# EAGLE board SparkFun_MicroMod_Function_ADIN1110-Panel_v01d (EAGLE 9.6.2), part 1 of 2
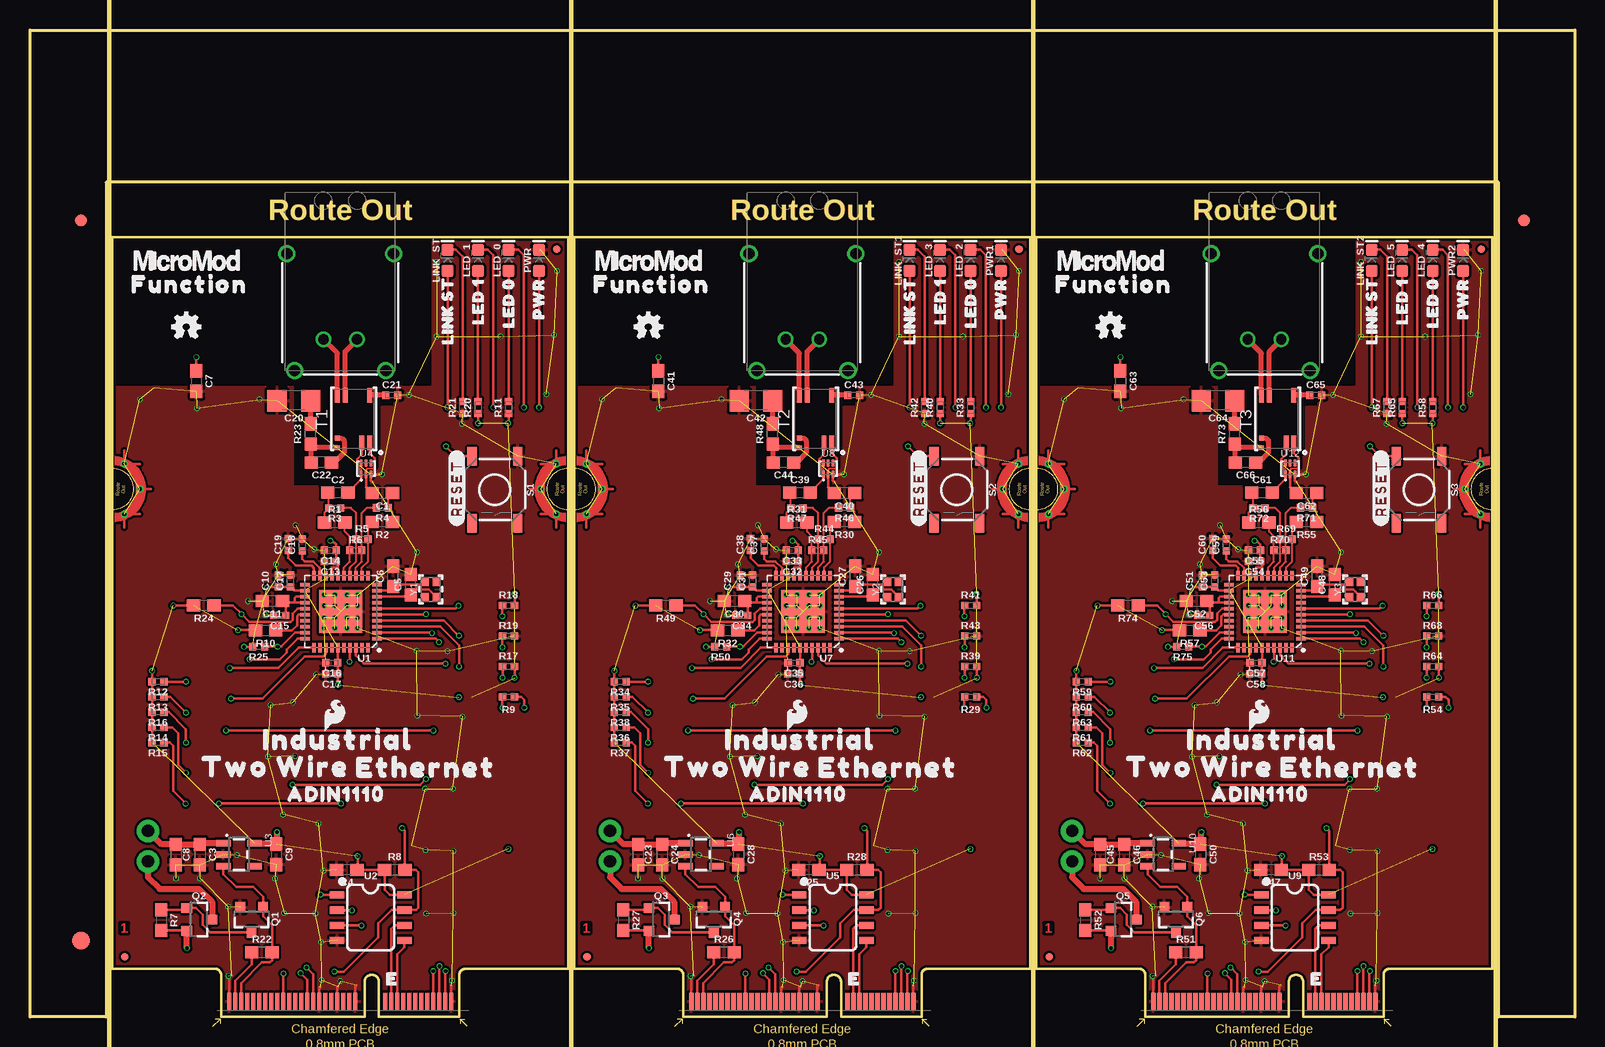
[diagram p0: board, top side]
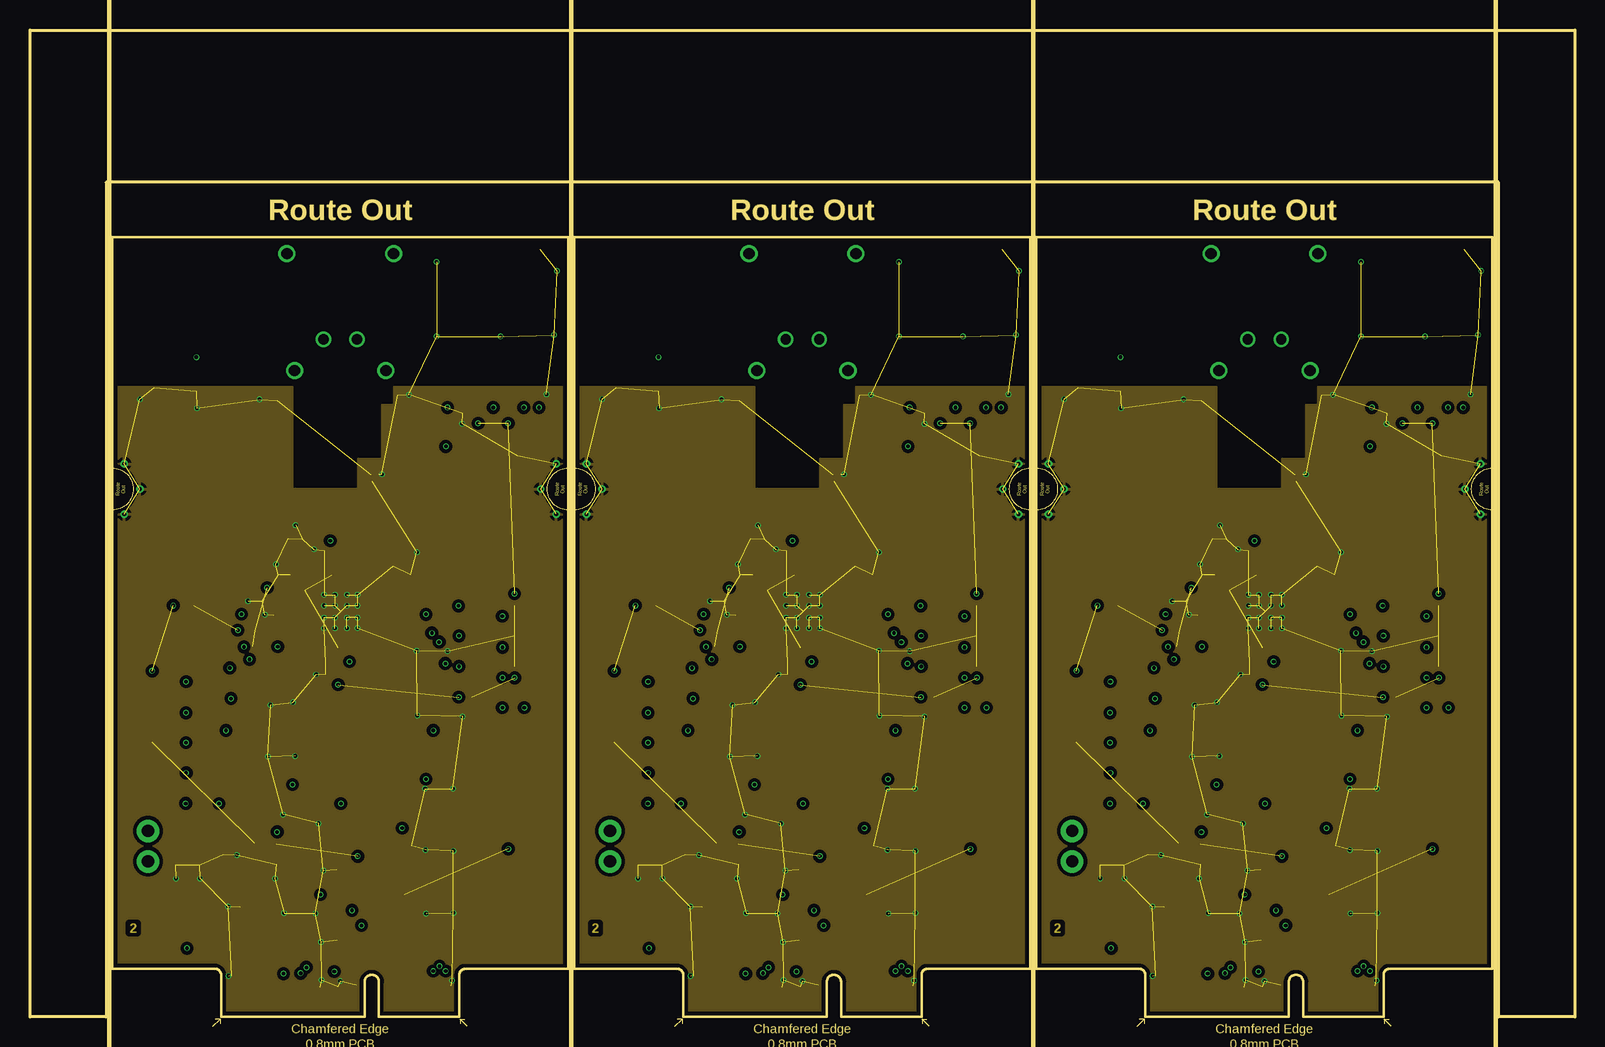
[diagram p1: board, inner layer Route2]
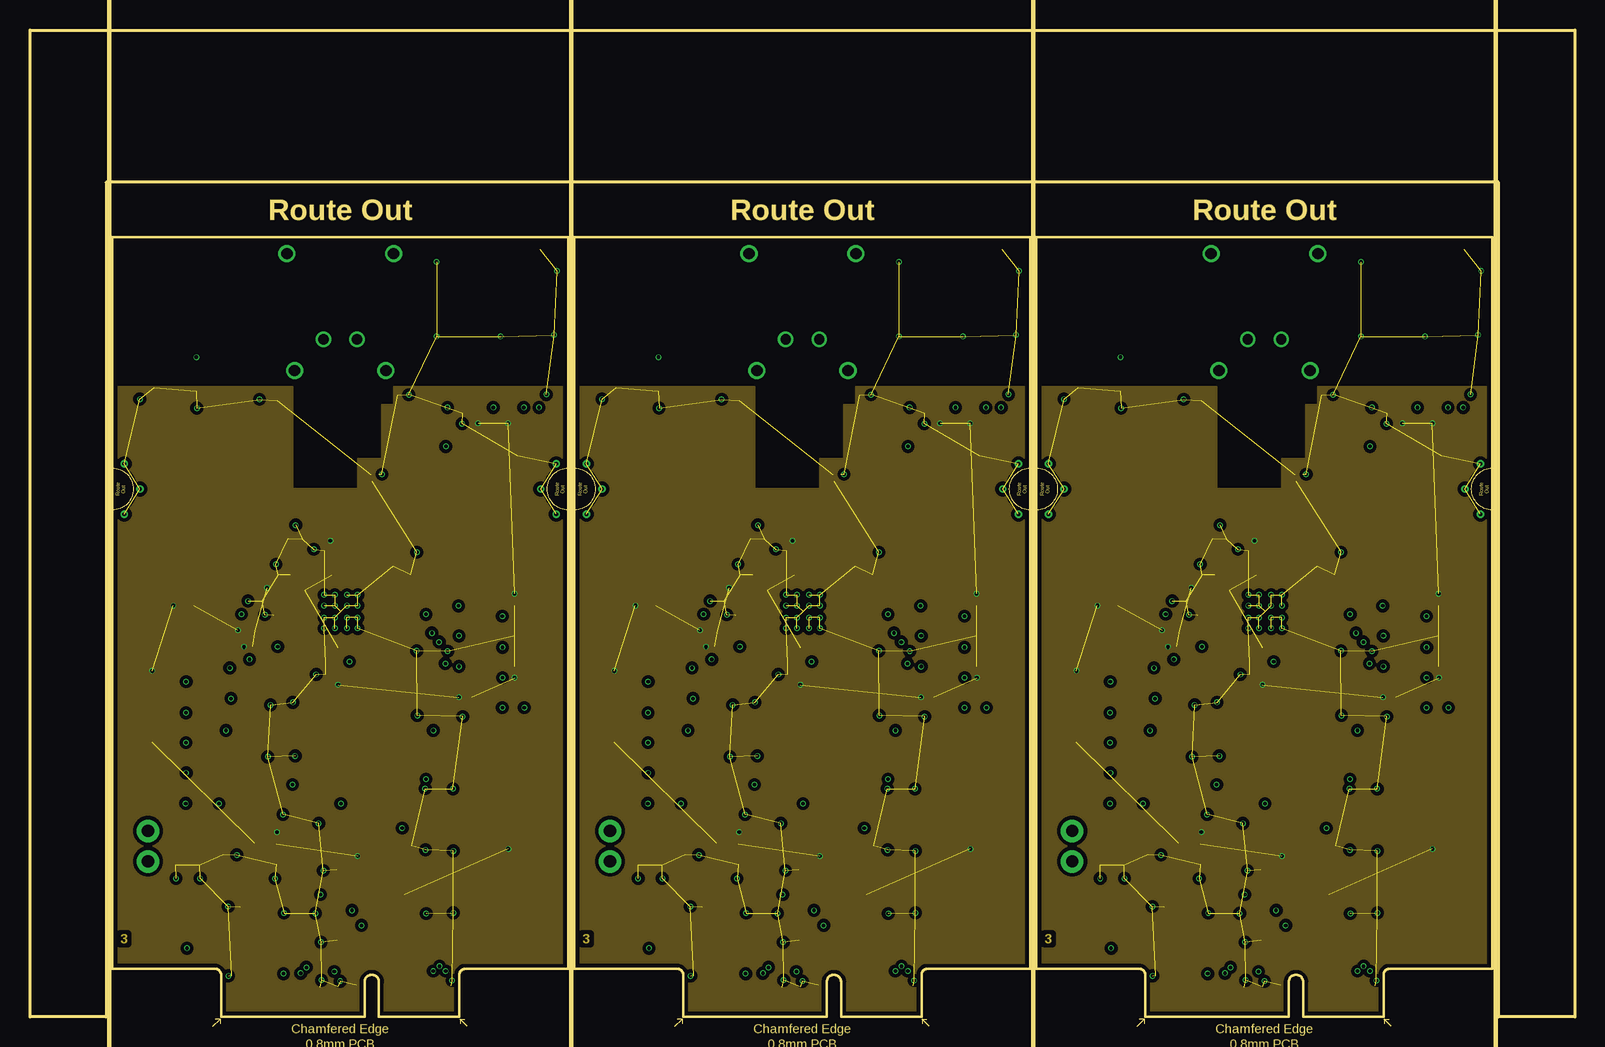
[diagram p2: board, inner layer Route15]
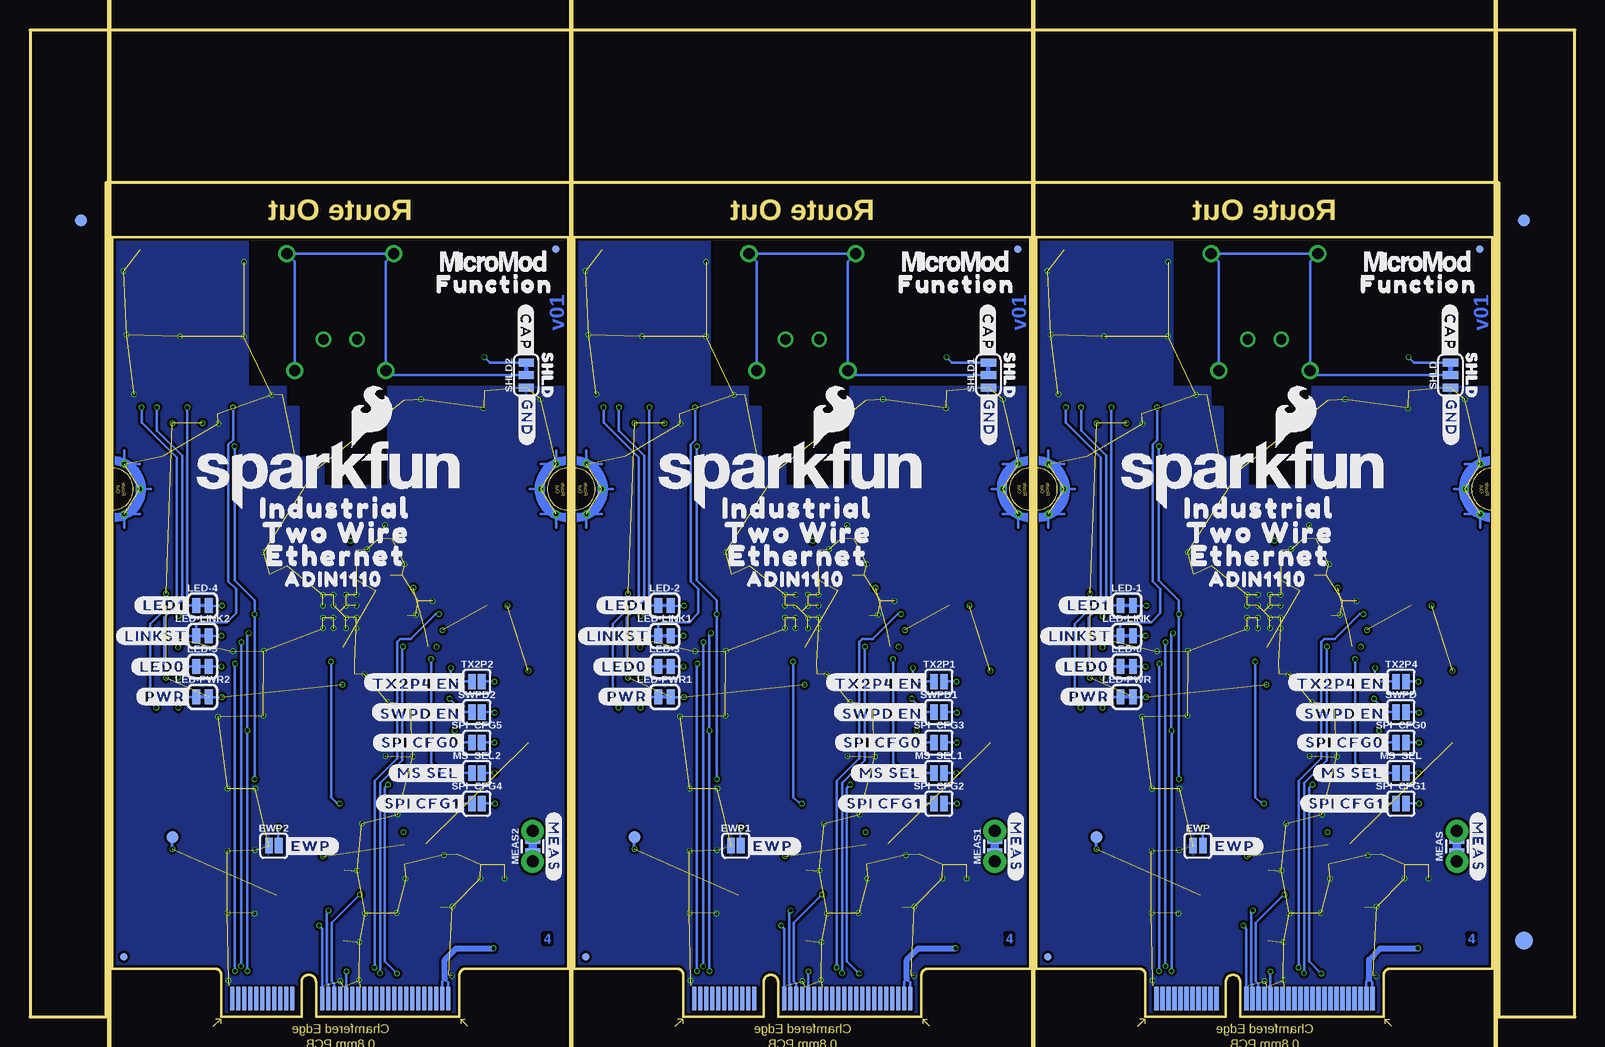
[diagram p3: board, bottom side, seen from below]

Size 128.73 x 82.27 mm. Coordinates in mm from the lower left corner, seen from the top.
Outline: 35.78,0 29.08,0 29.08,2.9 arc180 27.88,2.9 27.88,0 15.93,0 15.93,3.5 arc90 15.41,4 6.86,4 6.86,65 44.86,65 44.86,4 36.26,4 arc90 35.78,3.5 35.78,0
Outline: 74.29,0 67.59,0 67.59,2.9 arc180 66.39,2.9 66.39,0 54.44,0 54.44,3.5 arc90 53.92,4 45.37,4 45.37,65 83.37,65 83.37,4 74.77,4 arc90 74.29,3.5 74.29,0
Outline: 112.8,0 106.1,0 106.1,2.9 arc180 104.9,2.9 104.9,0 92.95,0 92.95,3.5 arc90 92.42,4 83.87,4 83.87,65 121.87,65 121.87,4 113.27,4 arc90 112.8,3.5 112.8,0
Outline: 128.73,82.27 128.73,0 122.38,0 122.38,69.57 6.35,69.57 6.35,0 0,0 0,82.27 128.73,82.27
Copper layers (1+2*15+16): Top 0.035mm / dielectric 1.5mm / Route2 0.035mm / dielectric 0.15mm / Route15 0.035mm / dielectric 0.2mm / Bottom 0.035mm
Design rules "SparkFun_MicroMod_Function_ADIN1110": minimum track width 4mil, minimum drill 0.2mm, track to track 4mil, track to pad 4mil, pad to pad 4mil, via to via 4mil, smd to smd 4mil, copper to edge 6mil, drill to drill 6mil, minimum pad ring 3mil, minimum via ring 3mil, stop-mask expansion 2.5mil, vias tented up to drill 25mil, thermal gap 10mil
Net classes: 0 default: width 0 mm, drill 0 mm
Milling: 4 lines

## Footprints (pad centres in the part's own frame; a part is rotated, then mirrored left to right if it is on the bottom)
0603 = smd 1.1 x 1: 1 -0.85,0; 2 0.85,0
0402-TIGHT = smd 0.6 x 0.6: 1 -0.5,0; 2 0.5,0
1206 = smd 1.6 x 1.8: 1 -1.4,0; 2 1.4,0
FIDUCIAL-1X2 = smd 1 x 1: 1 0,0
FIDUCIAL-1.5X3 = smd 1.5 x 1.5: 1 0,0
SMT-JUMPER_2_NO_SILK = smd 0.635 x 1.27: 1 -0.406,0; 2 0.406,0
FIDUCIAL-MICRO = smd 0.635 x 0.635: 1 0,0
T1_INDUSTRIAL_JACK_AH_IP20 = drill 0.85 pad 1.25: 1 1.4,8.52; 2 -1.4,8.52 | drill 0.95 pad 1.35: S1 -3.8,11.12; S2 3.8,11.12; S3 4.45,1.37; S4 -4.45,1.37
M.2-CARD-E-22_FUNCTION_STANDARD = smd 0.35 x 1.45: 1 9.25,1.275; 3 8.75,1.275; 5 8.25,1.275; 7 7.75,1.275; 9 7.25,1.275; 11 6.75,1.275; 13 6.25,1.275; 15 5.75,1.275; 17 5.25,1.275; 19 4.75,1.275; 21 4.25,1.275; 23 3.75,1.275; 33 1.25,1.275; 35 0.75,1.275; 37 0.25,1.275; 39 -0.25,1.275; 41 -0.75,1.275; 43 -1.25,1.275; 45 -1.75,1.275; 47 -2.25,1.275; 49 -2.75,1.275; 51 -3.25,1.275; 53 -3.75,1.275; 55 -4.25,1.275; 57 -4.75,1.275; 59 -5.25,1.275; 61 -5.75,1.275; 63 -6.25,1.275; 65 -6.75,1.275; 67 -7.25,1.275; 69 -7.75,1.275; 71 -8.25,1.275; 73 -8.75,1.275; 75 -9.25,1.275 | smd 0.35 x 1.95 bottom: 2 9,1.525; 4 8.5,1.525; 6 8,1.525; 8 7.5,1.525; 10 7,1.525; 12 6.5,1.525; 14 6,1.525; 16 5.5,1.525; 18 5,1.525; 20 4.5,1.525; 22 4,1.525; 32 1.5,1.525; 34 1,1.525; 36 0.5,1.525; 38 0,1.525; 40 -0.5,1.525; 42 -1,1.525; 44 -1.5,1.525; 46 -2,1.525; 48 -2.5,1.525; 50 -3,1.525; 52 -3.5,1.525; 54 -4,1.525; 56 -4.5,1.525; 58 -5,1.525; 60 -5.5,1.525; 62 -6,1.525; 64 -6.5,1.525; 66 -7,1.525; 68 -7.5,1.525; 70 -8,1.525; 72 -8.5,1.525; 74 -9,1.525 | drill 0.305 pad 0.61: GND1 -18,41.9; GND2 -16.7,44; GND3 -18,46.1; GND4 18,41.9; GND5 16.7,44; GND6 18,46.1
SMT-JUMPER_2_NC_TRACE_SILK = smd 0.66 x 1.27: 1 -0.521,0; 2 0.521,0
LED-0603 = smd 1 x 1: A -0.877,0; C 0.877,0
COMBO-JUMPER_2_NC_TRACE = smd 0.635 x 1.27: 1 -0.508,0; 2 0.508,0 | drill 1.016 pad 1.88: 3 -1.27,0; 4 1.27,0
SOT23-3 = smd 0.8 x 0.9: 1 -0.95,-1; 2 0.95,-1; 3 0,1.1
TACTILE_SWITCH_SMD_5.2MM = smd 1.524 x 0.762: 1 -2.794,1.905; 2 2.794,1.905; 3 -2.794,-1.905; 4 2.794,-1.905
SMT-JUMPER_3_1-NC_TRACE_SILK = smd 0.66 x 1.27: 1 -1.041,0; 2 0,0; 3 1.041,0
WE_STST_TRANSFORMER_1:1_SMD_3.2X4.7MM_74930030 = smd 1.2 x 0.41: 1 -1.99,-1.35; 2 -1.99,-0.7; 5 1.99,-1.35; 6 1.99,0.7; 7 1.99,1.35 | smd 0.4 x 0.41: 3 -2.39,1.35; 4 -1.59,1.35
PAD.03X.04 = smd 1.016 x 1.016: 1 0,0
LFCSP-40 = smd 0.8 x 0.285: 1 -3,2.25; 2 -3,1.75; 3 -3,1.25; 4 -3,0.75; 5 -3,0.25; 6 -3,-0.25; 7 -3,-0.75; 8 -3,-1.25; 9 -3,-1.75; 10 -3,-2.25; 21 3,-2.25; 22 3,-1.75; 23 3,-1.25; 24 3,-0.75; 25 3,-0.25; 26 3,0.25; 27 3,0.75; 28 3,1.25; 29 3,1.75; 30 3,2.25 | smd 0.285 x 0.8: 11 -2.25,-3; 12 -1.75,-3; 13 -1.25,-3; 14 -0.75,-3; 15 -0.25,-3; 16 0.25,-3; 17 0.75,-3; 18 1.25,-3; 19 1.75,-3; 20 2.25,-3; 31 2.25,3; 32 1.75,3; 33 1.25,3; 34 0.75,3; 35 0.25,3; 36 -0.25,3; 37 -0.75,3; 38 -1.25,3; 39 -1.75,3; 40 -2.25,3 | smd 3.6 x 3.6: EP 0,0
SO08 = smd 0.6 x 1.2: 1 -1.905,-2.8; 2 -0.635,-2.8; 3 0.635,-2.8; 4 1.905,-2.8; 5 1.905,2.8; 6 0.635,2.8; 7 -0.635,2.8; 8 -1.905,2.8
SOT23-5 = smd 0.55 x 1.2: 1 -0.95,-1.3; 2 0,-1.3; 3 0.95,-1.3; 4 0.95,1.3; 5 -0.95,1.3
WE_TVS_1.0X1.2MM = smd 0.2 x 0.6: 1 -0.4,-0.475; 2 0,-0.475; 3 0.4,-0.475; 4 0.4,0.475; 5 0,0.475; 6 -0.4,0.475
CRYSTAL-SMD-2.0X1.6MM = smd 0.75 x 0.7: 1 -0.675,-0.5; 2 0.675,-0.5; 3 0.675,0.5; 4 -0.675,0.5

## Placement (x,y rotation side)
C1  0.22uF  [0603]  29.36,43.65 180 top
C2  0.22uF  [0603]  25.65,43.7 0 top
C3  0.1uF  [0603]  14.16,13.53 270 top
C4  0.1uF  [0603]  26.4,12.27 180 top
C5  10pF  [0603]  31.73,36.03 90 top
C6  10pF  [0603]  30.26,36.72 90 top
C7  3.3nF  [0603]  13.86,53 270 top
C8  1.0uF  [0603]  12.16,13.53 270 top
C9  1.0uF  [0603]  20.53,13.54 270 top
C10  0.1uF  [0402-TIGHT]  20.69,36.35 90 top
C11  0.68uF  [0603]  20.19,34.65 180 top
C12  10nF  [0402-TIGHT]  21.71,36.34 90 top
C13  0.1uF  [0402-TIGHT]  25.02,37.97 180 top
C14  10nF  [0402-TIGHT]  25.02,38.9 180 top
C15  0.1uF  [0402-TIGHT]  20.8,33.46 180 top
C16  0.1uF  [0402-TIGHT]  25.15,29.52 180 top
C17  10nF  [0402-TIGHT]  25.14,28.59 180 top
C18  0.1uF  [0402-TIGHT]  22.68,39.35 90 top
C19  1.0uF  [0402-TIGHT]  21.54,39.37 90 top
C20  1.0nF/2kV  [1206]  21.99,51.36 180 top
C21  0.1uF/50V  [0402-TIGHT]  30.14,51.82 0 top
C22  0.1uF/100V  [0603]  24.28,46.23 180 top
C23  1.0uF  [0603]  50.67,13.53 270 top
C24  0.1uF  [0603]  52.67,13.53 270 top
C25  0.1uF  [0603]  64.91,12.27 180 top
C26  10pF  [0603]  70.24,36.03 90 top
C27  10pF  [0603]  68.77,36.72 90 top
C28  1.0uF  [0603]  59.03,13.54 270 top
C29  0.1uF  [0402-TIGHT]  59.2,36.35 90 top
C30  0.68uF  [0603]  58.7,34.65 180 top
C31  10nF  [0402-TIGHT]  60.22,36.34 90 top
C32  0.1uF  [0402-TIGHT]  63.53,37.97 180 top
C33  10nF  [0402-TIGHT]  63.53,38.9 180 top
C34  0.1uF  [0402-TIGHT]  59.31,33.46 180 top
C35  0.1uF  [0402-TIGHT]  63.66,29.52 180 top
C36  10nF  [0402-TIGHT]  63.65,28.59 180 top
C37  0.1uF  [0402-TIGHT]  61.19,39.35 90 top
C38  1.0uF  [0402-TIGHT]  60.05,39.37 90 top
C39  0.22uF  [0603]  64.16,43.7 0 top
C40  0.22uF  [0603]  67.87,43.65 180 top
C41  3.3nF  [0603]  52.37,53 270 top
C42  1.0nF/2kV  [1206]  60.5,51.36 180 top
C43  0.1uF/50V  [0402-TIGHT]  68.65,51.82 0 top
C44  0.1uF/100V  [0603]  62.79,46.23 180 top
C45  1.0uF  [0603]  89.17,13.53 270 top
C46  0.1uF  [0603]  91.17,13.53 270 top
C47  0.1uF  [0603]  103.41,12.27 180 top
C48  10pF  [0603]  108.75,36.03 90 top
C49  10pF  [0603]  107.28,36.72 90 top
C50  1.0uF  [0603]  97.54,13.54 270 top
C51  0.1uF  [0402-TIGHT]  97.71,36.35 90 top
C52  0.68uF  [0603]  97.21,34.65 180 top
C53  10nF  [0402-TIGHT]  98.72,36.34 90 top
C54  0.1uF  [0402-TIGHT]  102.03,37.97 180 top
C55  10nF  [0402-TIGHT]  102.03,38.9 180 top
C56  0.1uF  [0402-TIGHT]  97.82,33.46 180 top
C57  0.1uF  [0402-TIGHT]  102.17,29.52 180 top
C58  10nF  [0402-TIGHT]  102.15,28.59 180 top
C59  0.1uF  [0402-TIGHT]  99.7,39.35 90 top
C60  1.0uF  [0402-TIGHT]  98.55,39.37 90 top
C61  0.22uF  [0603]  102.67,43.7 0 top
C62  0.22uF  [0603]  106.38,43.65 180 top
C63  3.3nF  [0603]  90.87,53 270 top
C64  1.0nF/2kV  [1206]  99,51.36 180 top
C65  0.1uF/50V  [0402-TIGHT]  107.15,51.82 0 top
C66  0.1uF/100V  [0603]  101.3,46.23 180 top
E$1  [FIDUCIAL-1X2]  4.23,66.4 0 top
E$2  [FIDUCIAL-1X2]  4.23,66.4 0 bottom
E$3  [FIDUCIAL-1X2]  124.5,66.4 0 top
E$4  [FIDUCIAL-1X2]  124.5,66.4 0 bottom
E$5  [FIDUCIAL-1.5X3]  4.23,6.35 0 top
E$6  [FIDUCIAL-1.5X3]  4.23,6.35 0 bottom
EWP  JUMPER-SMT_2_NO_SILK  [SMT-JUMPER_2_NO_SILK]  31.4,14.27 0 bottom
EWP1  JUMPER-SMT_2_NO_SILK  [SMT-JUMPER_2_NO_SILK]  69.91,14.27 0 bottom
EWP2  JUMPER-SMT_2_NO_SILK  [SMT-JUMPER_2_NO_SILK]  108.41,14.27 0 bottom
FD1  FIDUCIALUFIDUCIAL  [FIDUCIAL-MICRO]  7.91,5 90 top
FD2  FIDUCIALUFIDUCIAL  [FIDUCIAL-MICRO]  43.91,64 90 top
FD3  FIDUCIALUFIDUCIAL  [FIDUCIAL-MICRO]  43.91,5 270 bottom
FD4  FIDUCIALUFIDUCIAL  [FIDUCIAL-MICRO]  7.91,64 270 bottom
FD5  FIDUCIALUFIDUCIAL  [FIDUCIAL-MICRO]  46.42,5 90 top
FD6  FIDUCIALUFIDUCIAL  [FIDUCIAL-MICRO]  82.42,64 90 top
FD7  FIDUCIALUFIDUCIAL  [FIDUCIAL-MICRO]  82.42,5 270 bottom
FD8  FIDUCIALUFIDUCIAL  [FIDUCIAL-MICRO]  46.42,64 270 bottom
FD9  FIDUCIALUFIDUCIAL  [FIDUCIAL-MICRO]  84.92,5 90 top
FD10  FIDUCIALUFIDUCIAL  [FIDUCIAL-MICRO]  120.92,64 90 top
FD11  FIDUCIALUFIDUCIAL  [FIDUCIAL-MICRO]  120.92,5 270 bottom
FD12  FIDUCIALUFIDUCIAL  [FIDUCIAL-MICRO]  84.92,64 270 bottom
J1  T1_INDUSTRIAL  [T1_INDUSTRIAL_JACK_AH_IP20]  25.86,65 180 top
J2  MICROMOD_FUNCTION_STANDARD  [M.2-CARD-E-22_FUNCTION_STANDARD]  25.86,0 0 top
J3  MICROMOD_FUNCTION_STANDARD  [M.2-CARD-E-22_FUNCTION_STANDARD]  64.37,0 0 top
J4  T1_INDUSTRIAL  [T1_INDUSTRIAL_JACK_AH_IP20]  64.37,65 180 top
J5  MICROMOD_FUNCTION_STANDARD  [M.2-CARD-E-22_FUNCTION_STANDARD]  102.87,0 0 top
J6  T1_INDUSTRIAL  [T1_INDUSTRIAL_JACK_AH_IP20]  102.87,65 180 top
LED-0  JUMPER-SMT_2_NC_TRACE_SILK  [SMT-JUMPER_2_NC_TRACE_SILK]  37.34,29.21 0 bottom
LED-1  JUMPER-SMT_2_NC_TRACE_SILK  [SMT-JUMPER_2_NC_TRACE_SILK]  37.34,34.29 0 bottom
LED-2  JUMPER-SMT_2_NC_TRACE_SILK  [SMT-JUMPER_2_NC_TRACE_SILK]  75.85,34.29 0 bottom
LED-3  JUMPER-SMT_2_NC_TRACE_SILK  [SMT-JUMPER_2_NC_TRACE_SILK]  75.85,29.21 0 bottom
LED-4  JUMPER-SMT_2_NC_TRACE_SILK  [SMT-JUMPER_2_NC_TRACE_SILK]  114.35,34.29 0 bottom
LED-5  JUMPER-SMT_2_NC_TRACE_SILK  [SMT-JUMPER_2_NC_TRACE_SILK]  114.35,29.21 0 bottom
LED-LINK  JUMPER-SMT_2_NC_TRACE_SILK  [SMT-JUMPER_2_NC_TRACE_SILK]  37.34,31.75 0 bottom
LED-LINK1  JUMPER-SMT_2_NC_TRACE_SILK  [SMT-JUMPER_2_NC_TRACE_SILK]  75.85,31.75 0 bottom
LED-LINK2  JUMPER-SMT_2_NC_TRACE_SILK  [SMT-JUMPER_2_NC_TRACE_SILK]  114.35,31.75 0 bottom
LED-PWR  JUMPER-SMT_2_NC_TRACE_SILK  [SMT-JUMPER_2_NC_TRACE_SILK]  37.34,26.67 0 bottom
LED-PWR1  JUMPER-SMT_2_NC_TRACE_SILK  [SMT-JUMPER_2_NC_TRACE_SILK]  75.85,26.67 0 bottom
LED-PWR2  JUMPER-SMT_2_NC_TRACE_SILK  [SMT-JUMPER_2_NC_TRACE_SILK]  114.35,26.67 0 bottom
LED_0  Green  [LED-0603]  39.88,63.08 90 top
LED_1  Yellow  [LED-0603]  37.34,63.08 90 top
LED_2  Green  [LED-0603]  78.39,63.08 90 top
LED_3  Yellow  [LED-0603]  75.85,63.08 90 top
LED_4  Green  [LED-0603]  116.89,63.08 90 top
LED_5  Yellow  [LED-0603]  114.35,63.08 90 top
LINK_ST  Blue  [LED-0603]  34.8,63.08 90 top
LINK_ST1  Blue  [LED-0603]  73.31,63.08 90 top
LINK_ST2  Blue  [LED-0603]  111.81,63.08 90 top
LOGO1  SFE_LOGO_NAME_FLAME.2_INCH  [SFE_LOGO_NAME_FLAME_.2]  26.8,45.21 0 bottom
LOGO2  OSHW-LOGOMINI  [OSHW-LOGO-MINI]  51.53,57.53 0 top
LOGO3  OSHW-LOGOMINI  [OSHW-LOGO-MINI]  13.02,57.53 0 top
LOGO4  SFE_LOGO_NAME_FLAME.2_INCH  [SFE_LOGO_NAME_FLAME_.2]  65.31,45.21 0 bottom
LOGO5  OSHW-LOGOMINI  [OSHW-LOGO-MINI]  90.03,57.53 0 top
LOGO6  SFE_LOGO_NAME_FLAME.2_INCH  [SFE_LOGO_NAME_FLAME_.2]  103.81,45.21 0 bottom
MEAS  JUMPER-COMBO_2_NC_TRACE  [COMBO-JUMPER_2_NC_TRACE]  9.83,14.22 90 bottom
MEAS1  JUMPER-COMBO_2_NC_TRACE  [COMBO-JUMPER_2_NC_TRACE]  48.34,14.22 90 bottom
MEAS2  JUMPER-COMBO_2_NC_TRACE  [COMBO-JUMPER_2_NC_TRACE]  86.84,14.22 90 bottom
MS_SEL  [SMT-JUMPER_2_NO_SILK]  14.48,20.32 0 bottom
MS_SEL1  [SMT-JUMPER_2_NO_SILK]  52.99,20.32 0 bottom
MS_SEL2  [SMT-JUMPER_2_NO_SILK]  91.49,20.32 0 bottom
PWR  Red  [LED-0603]  42.42,63.08 90 top
PWR1  Red  [LED-0603]  80.93,63.08 90 top
PWR2  Red  [LED-0603]  119.43,63.08 90 top
Q1  220mA/50V/3.5Ω  [SOT23-3]  18.47,8.15 180 top
Q2  20V/4.2A/52mΩ/1.4W  [SOT23-3]  14.07,8.12 270 top
Q3  20V/4.2A/52mΩ/1.4W  [SOT23-3]  52.58,8.12 270 top
Q4  220mA/50V/3.5Ω  [SOT23-3]  56.98,8.15 180 top
Q5  20V/4.2A/52mΩ/1.4W  [SOT23-3]  91.08,8.12 270 top
Q6  220mA/50V/3.5Ω  [SOT23-3]  95.49,8.15 180 top
R1  49.9  [0603]  25.39,41.23 0 top
R2  49.9  [0603]  29.36,41.25 180 top
R3  4.7Ω  [0402-TIGHT]  25.41,42.42 180 top
R4  4.7Ω  [0402-TIGHT]  29.36,42.45 180 top
R5  10Ω  [0402-TIGHT]  27.67,39.81 0 top
R6  10Ω  [0402-TIGHT]  27.15,38.9 0 top
R7  10k  [0603]  10.94,8.06 270 top
R8  10k  [0603]  30.4,12.27 0 top
R9  1k  [0402-TIGHT]  39.88,26.67 180 top
R10  1.5k  [0603]  19.63,32.2 180 top
R11  1k  [0402-TIGHT]  39.88,50.8 90 top
R12  4.7k  [0402-TIGHT]  10.67,27.94 180 top
R13  4.7k  [0402-TIGHT]  10.67,26.67 180 top
R14  4.7k  [0402-TIGHT]  10.67,24.13 180 top
R15  4.7k  [0402-TIGHT]  10.67,22.86 180 top
R16  4.7k  [0402-TIGHT]  10.67,25.4 180 top
R17  4.7k  [0402-TIGHT]  39.88,29.21 0 top
R18  4.7k  [0402-TIGHT]  39.88,34.29 0 top
R19  4.7k  [0402-TIGHT]  39.88,31.75 0 top
R20  1k  [0402-TIGHT]  37.34,50.8 90 top
R21  1k  [0402-TIGHT]  36.07,50.8 90 top
R22  10k  [0603]  19.32,5.4 0 top
R23  100Ω  [0603]  23.38,48.6 90 top
R24  1.5k  [0603]  14.48,34.29 180 top
R25  4.7k  [0402-TIGHT]  19.05,30.86 180 top
R26  10k  [0603]  57.83,5.4 0 top
R27  10k  [0603]  49.45,8.06 270 top
R28  10k  [0603]  68.91,12.27 0 top
R29  1k  [0402-TIGHT]  78.39,26.67 180 top
R30  49.9  [0603]  67.87,41.25 180 top
R31  49.9  [0603]  63.9,41.23 0 top
R32  1.5k  [0603]  58.14,32.2 180 top
R33  1k  [0402-TIGHT]  78.39,50.8 90 top
R34  4.7k  [0402-TIGHT]  49.18,27.94 180 top
R35  4.7k  [0402-TIGHT]  49.18,26.67 180 top
R36  4.7k  [0402-TIGHT]  49.18,24.13 180 top
R37  4.7k  [0402-TIGHT]  49.18,22.86 180 top
R38  4.7k  [0402-TIGHT]  49.18,25.4 180 top
R39  4.7k  [0402-TIGHT]  78.39,29.21 0 top
R40  1k  [0402-TIGHT]  75.85,50.8 90 top
R41  4.7k  [0402-TIGHT]  78.39,34.29 0 top
R42  1k  [0402-TIGHT]  74.58,50.8 90 top
R43  4.7k  [0402-TIGHT]  78.39,31.75 0 top
R44  10Ω  [0402-TIGHT]  66.18,39.81 0 top
R45  10Ω  [0402-TIGHT]  65.66,38.9 0 top
R46  4.7Ω  [0402-TIGHT]  67.87,42.45 180 top
R47  4.7Ω  [0402-TIGHT]  63.92,42.42 180 top
R48  100Ω  [0603]  61.89,48.6 90 top
R49  1.5k  [0603]  52.99,34.29 180 top
R50  4.7k  [0402-TIGHT]  57.56,30.86 180 top
R51  10k  [0603]  96.33,5.4 0 top
R52  10k  [0603]  87.96,8.06 270 top
R53  10k  [0603]  107.41,12.27 0 top
R54  1k  [0402-TIGHT]  116.89,26.67 180 top
R55  49.9  [0603]  106.38,41.25 180 top
R56  49.9  [0603]  102.41,41.23 0 top
R57  1.5k  [0603]  96.65,32.2 180 top
R58  1k  [0402-TIGHT]  116.89,50.8 90 top
R59  4.7k  [0402-TIGHT]  87.68,27.94 180 top
R60  4.7k  [0402-TIGHT]  87.68,26.67 180 top
R61  4.7k  [0402-TIGHT]  87.68,24.13 180 top
R62  4.7k  [0402-TIGHT]  87.68,22.86 180 top
R63  4.7k  [0402-TIGHT]  87.68,25.4 180 top
R64  4.7k  [0402-TIGHT]  116.89,29.21 0 top
R65  1k  [0402-TIGHT]  114.35,50.8 90 top
R66  4.7k  [0402-TIGHT]  116.89,34.29 0 top
R67  1k  [0402-TIGHT]  113.08,50.8 90 top
R68  4.7k  [0402-TIGHT]  116.89,31.75 0 top
R69  10Ω  [0402-TIGHT]  104.69,39.81 0 top
R70  10Ω  [0402-TIGHT]  104.16,38.9 0 top
R71  4.7Ω  [0402-TIGHT]  106.38,42.45 180 top
R72  4.7Ω  [0402-TIGHT]  102.42,42.42 180 top
R73  100Ω  [0603]  100.4,48.6 90 top
R74  1.5k  [0603]  91.49,34.29 180 top
R75  4.7k  [0402-TIGHT]  96.07,30.86 180 top
S1  RESET  [TACTILE_SWITCH_SMD_5.2MM]  38.73,43.94 270 top
S2  RESET  [TACTILE_SWITCH_SMD_5.2MM]  77.24,43.94 270 top
S3  RESET  [TACTILE_SWITCH_SMD_5.2MM]  115.75,43.94 270 top
SHLD  [SMT-JUMPER_3_1-NC_TRACE_SILK]  10.36,53.5 90 bottom
SHLD1  [SMT-JUMPER_3_1-NC_TRACE_SILK]  48.87,53.5 90 bottom
SHLD2  [SMT-JUMPER_3_1-NC_TRACE_SILK]  87.37,53.5 90 bottom
SPI_CFG0  [SMT-JUMPER_2_NO_SILK]  14.48,22.86 0 bottom
SPI_CFG1  [SMT-JUMPER_2_NO_SILK]  14.48,17.78 0 bottom
SPI_CFG2  [SMT-JUMPER_2_NO_SILK]  52.99,17.78 0 bottom
SPI_CFG3  [SMT-JUMPER_2_NO_SILK]  52.99,22.86 0 bottom
SPI_CFG4  [SMT-JUMPER_2_NO_SILK]  91.49,17.78 0 bottom
SPI_CFG5  [SMT-JUMPER_2_NO_SILK]  91.49,22.86 0 bottom
SWPD  [SMT-JUMPER_2_NO_SILK]  14.48,25.4 0 bottom
SWPD1  [SMT-JUMPER_2_NO_SILK]  52.99,25.4 0 bottom
SWPD2  [SMT-JUMPER_2_NO_SILK]  91.49,25.4 0 bottom
T1  WE-STST  [WE_STST_TRANSFORMER_1:1_SMD_3.2X4.7MM_74930030]  26.96,49.84 90 top
T2  WE-STST  [WE_STST_TRANSFORMER_1:1_SMD_3.2X4.7MM_74930030]  65.47,49.84 90 top
T3  WE-STST  [WE_STST_TRANSFORMER_1:1_SMD_3.2X4.7MM_74930030]  103.97,49.84 90 top
TP1  TEST-POINT3X4  [PAD.03X.04]  39.86,15 0 bottom
TP2  TEST-POINT3X4  [PAD.03X.04]  78.37,15 0 bottom
TP3  TEST-POINT3X4  [PAD.03X.04]  116.87,15 0 bottom
TX2P1  [SMT-JUMPER_2_NO_SILK]  52.99,27.94 0 bottom
TX2P2  [SMT-JUMPER_2_NO_SILK]  91.49,27.94 0 bottom
TX2P4  [SMT-JUMPER_2_NO_SILK]  14.48,27.94 0 bottom
U1  ADIN1110  [LFCSP-40]  25.91,33.78 180 top
U2  EEPROM  [SO08]  28.4,8.27 270 top
U3  3.3V  [SOT23-5]  17.41,13.53 270 top
U4  WE-TVS  [WE_TVS_1.0X1.2MM]  28,45.7 0 top
U5  EEPROM  [SO08]  66.91,8.27 270 top
U6  3.3V  [SOT23-5]  55.92,13.53 270 top
U7  ADIN1110  [LFCSP-40]  64.42,33.78 180 top
U8  WE-TVS  [WE_TVS_1.0X1.2MM]  66.51,45.7 0 top
U9  EEPROM  [SO08]  105.41,8.27 270 top
U10  3.3V  [SOT23-5]  94.43,13.53 270 top
U11  ADIN1110  [LFCSP-40]  102.92,33.78 180 top
U12  WE-TVS  [WE_TVS_1.0X1.2MM]  105.02,45.7 0 top
U$1  [#RESET#0]  35.56,44.07 90 top
U$2  [INDUSTRIAL0]  25.65,23.11 0 top
U$3  [ETHERNET0]  32.96,20.81 0 top
U$4  [ADIN11100]  25.52,18.57 0 top
U$5  [SFE_LOGO_FLAME_.1]  25.4,25.15 0 top
U$6  [#PWR#19]  40.49,26.7 0 bottom
U$7  [PWR0]  42.39,59.85 90 top
U$8  [SHLD11]  8.61,53.45 270 bottom
U$9  [#EWP#18]  28.32,14.22 0 bottom
U$10  [#LED0#20]  40.7,29.19 0 bottom
U$11  [#GND#16]  10.31,49.95 270 bottom
U$12  [#CAP#17]  10.41,57.1 270 bottom
U$13  [##TX2P4_EN##4]  19.53,27.89 0 bottom
U$14  [#SPI_CFG1#0]  19.05,17.78 0 bottom
U$15  [#MS_SEL#2]  18.54,20.32 0 bottom
U$16  [#SPI_CFG0#0]  19.18,22.86 0 bottom
U$17  [MICROMOD_LOGO_.35]  51.52,63.04 0 top
U$18  [MICROMOD_LOGO_.35]  51.68,62.97 0 bottom
U$19  [INDUSTRIAL0]  26.29,42.42 0 bottom
U$20  [ETHERNET0]  26.22,38.44 0 bottom
U$21  [ADIN11100]  26.41,36.48 0 bottom
U$22  [##SWPD_EN##4]  19.21,25.4 0 bottom
U$23  [LED_03]  39.88,59.52 90 top
U$24  [FUNCTION0]  13.02,61.09 0 bottom
U$25  [LED_14]  37.34,59.65 90 top
U$26  [FUNCTION0]  13.26,61.09 0 top
U$27  [LINK_ST15]  34.8,58.89 90 top
U$28  [#MEAS#3]  8.07,16.99 270 bottom
U$29  [#LED1#21]  40.57,34.31 0 bottom
U$30  [TWO_WIRE3]  26.19,40.36 0 bottom
U$31  [#LINKST#2]  41.21,31.74 0 bottom
U$32  [TWO_WIRE3]  20.46,20.85 0 top
U$33  [#MEAS#3]  46.58,16.99 270 bottom
U$34  [PWR0]  80.9,59.85 90 top
U$35  [FUNCTION0]  51.77,61.09 0 top
U$36  [INDUSTRIAL0]  64.16,23.11 0 top
U$37  [MICROMOD_LOGO_.35]  13.17,62.97 0 bottom
U$38  [ETHERNET0]  71.47,20.81 0 top
U$39  [ADIN11100]  64.03,18.57 0 top
U$40  [SFE_LOGO_FLAME_.1]  63.91,25.15 0 top
U$41  [#RESET#0]  74.07,44.07 90 top
U$42  [SHLD11]  47.12,53.45 270 bottom
U$43  [#SPI_CFG1#0]  57.56,17.78 0 bottom
U$44  [#MS_SEL#2]  57.05,20.32 0 bottom
U$45  [#SPI_CFG0#0]  57.69,22.86 0 bottom
U$46  [INDUSTRIAL0]  64.8,42.42 0 bottom
U$47  [ETHERNET0]  64.73,38.44 0 bottom
U$48  [ADIN11100]  64.92,36.48 0 bottom
U$49  [FUNCTION0]  51.53,61.09 0 bottom
U$50  [LED_03]  78.39,59.52 90 top
U$51  [LED_14]  75.85,59.65 90 top
U$52  [LINK_ST15]  73.31,58.89 90 top
U$53  [#GND#16]  48.82,49.95 270 bottom
U$54  [#CAP#17]  48.92,57.1 270 bottom
U$55  [#EWP#18]  66.83,14.22 0 bottom
U$56  [#PWR#19]  79,26.7 0 bottom
U$57  [#LED0#20]  79.21,29.19 0 bottom
U$58  [#LED1#21]  79.08,34.31 0 bottom
U$59  [#LINKST#2]  79.72,31.74 0 bottom
U$60  [TWO_WIRE3]  64.7,40.36 0 bottom
U$61  [TWO_WIRE3]  58.97,20.85 0 top
U$62  [##TX2P4_EN##4]  58.04,27.89 0 bottom
U$63  [MICROMOD_LOGO_.35]  13.01,63.04 0 top
U$64  [##SWPD_EN##4]  57.72,25.4 0 bottom
U$65  [MICROMOD_LOGO_.35]  90.03,63.04 0 top
U$66  [MICROMOD_LOGO_.35]  90.19,62.97 0 bottom
U$67  [#MEAS#3]  85.09,16.99 270 bottom
U$68  [PWR0]  119.4,59.85 90 top
U$69  [FUNCTION0]  90.28,61.09 0 top
U$70  [INDUSTRIAL0]  102.67,23.11 0 top
U$71  [ETHERNET0]  109.98,20.81 0 top
U$72  [ADIN11100]  102.54,18.57 0 top
U$73  [SFE_LOGO_FLAME_.1]  102.42,25.15 0 top
U$74  [#RESET#0]  112.58,44.07 90 top
U$75  [SHLD11]  85.62,53.45 270 bottom
U$76  [#SPI_CFG1#0]  96.07,17.78 0 bottom
U$77  [#MS_SEL#2]  95.56,20.32 0 bottom
U$78  [#SPI_CFG0#0]  96.19,22.86 0 bottom
U$79  [INDUSTRIAL0]  103.3,42.42 0 bottom
U$80  [ETHERNET0]  103.23,38.44 0 bottom
U$81  [ADIN11100]  103.43,36.48 0 bottom
U$82  [FUNCTION0]  90.04,61.09 0 bottom
U$83  [LED_03]  116.89,59.52 90 top
U$84  [LED_14]  114.35,59.65 90 top
U$85  [LINK_ST15]  111.81,58.89 90 top
U$86  [#GND#16]  87.32,49.95 270 bottom
U$87  [#CAP#17]  87.42,57.1 270 bottom
U$88  [#EWP#18]  105.34,14.22 0 bottom
U$89  [#PWR#19]  117.5,26.7 0 bottom
U$90  [#LED0#20]  117.71,29.19 0 bottom
U$91  [#LED1#21]  117.58,34.31 0 bottom
U$92  [#LINKST#2]  118.22,31.74 0 bottom
U$93  [TWO_WIRE3]  103.2,40.36 0 bottom
U$94  [TWO_WIRE3]  97.47,20.85 0 top
U$95  [##TX2P4_EN##4]  96.55,27.89 0 bottom
U$96  [##SWPD_EN##4]  96.23,25.4 0 bottom
Y1  25MHz  [CRYSTAL-SMD-2.0X1.6MM]  33.4,35.63 90 top
Y2  25MHz  [CRYSTAL-SMD-2.0X1.6MM]  71.91,35.63 90 top
Y3  25MHz  [CRYSTAL-SMD-2.0X1.6MM]  110.41,35.63 90 top

## Library data of the parts
C1 C2 C39 C40 C61 C62 = SparkFun-Capacitors; PROD_ID: CAP-15456
C3 C4 C24 C25 C46 C47 = SparkFun-Capacitors; PROD_ID: CAP-00810
C5 C6 C26 C27 C48 C49 = SparkFun-Capacitors; PROD_ID: CAP-11812
C7 C41 C63 = SparkFun-Capacitors; PROD_ID: CAP-09633
C8 C23 C45 = SparkFun-Capacitors; PROD_ID: CAP-00868
C9 C28 C50 = SparkFun-Capacitors; PROD_ID: CAP-13930
C10 C13 C15 C16 C18 C29 C32 C34 C35 C37 C51 C54 C56 C57 C59 = SparkFun-Capacitors; PROD_ID: CAP-12416
C11 C30 C52 = SparkFun-Capacitors
C12 C14 C17 C31 C33 C36 C53 C55 C58 = SparkFun-Capacitors; PROD_ID: CAP-14847
C19 C38 C60 = SparkFun-Capacitors; PROD_ID: CAP-12417
C20 C42 C64 = SparkFun-Capacitors; PROD_ID: CAP-16430
C21 C43 C65 = SparkFun-Capacitors; PROD_ID: CAP-16431
C22 C44 C66 = SparkFun-Capacitors; PROD_ID: CAP-16436
E$1-E$4 FD1-FD12 LOGO1-LOGO6 U$5 U$40 U$73 = SparkFun-Aesthetics
E$5 E$6 = SparkFun-Retired
EWP EWP1 EWP2 LED-0 LED-1-LED-5 LED-LINK LED-LINK1 LED-LINK2 LED-PWR LED-PWR1 LED-PWR2 MEAS MEAS1 MEAS2 MS_SEL MS_SEL1 MS_SEL2 SHLD SHLD1 SHLD2 SPI_CFG0 SPI_CFG1-SPI_CFG5 SWPD SWPD1 SWPD2 TX2P1 TX2P2 TX2P4 = SparkFun-Jumpers
J1 J6 = ADIN1110; PROD_ID: CONN-16501
J2 J3 J5 U$17 U$18 U$37 U$63 U$65 U$66 = SparkFun-MicroMod
J4 = ADIN1110; PROD_ID: CONN-06501
LED_0 LED_2 LED_4 = SparkFun-LED; PROD_ID: DIO-00821
LED_1 LED_3 LED_5 = SparkFun-LED; PROD_ID: DIO-09003
LINK_ST LINK_ST1 LINK_ST2 = SparkFun-LED; PROD_ID: DIO-08575
PWR PWR1 PWR2 = SparkFun-LED; PROD_ID: DIO-00819
Q1 Q4 Q6 = SparkFun-DiscreteSemi; PROD_ID: TRANS-00830
Q2 Q3 Q5 = SparkFun-DiscreteSemi; PROD_ID: TRANS-14388
R1 R2 R30 R31 R55 R56 = SparkFun-Resistors; PROD_ID: RES-16237
R3 R4 R46 R47 R71 R72 = SparkFun-Resistors; PROD_ID: RES-16312
R5 R6 R44 R45 R69 R70 = SparkFun-Resistors; PROD_ID: RES-16072
R7 R8 R22 R26-R28 R51-R53 = SparkFun-Resistors; PROD_ID: RES-00824
R9 R11 R20 R21 R29 R33 R40 R42 R54 R58 R65 R67 = SparkFun-Resistors; PROD_ID: RES-14342
R10 R24 R32 R49 R57 R74 = SparkFun-Resistors; PROD_ID: RES-08306
R12-R19 R25 R34-R39 R41 R43 R50 R59-R64 R66 R68 R75 = SparkFun-Resistors; PROD_ID: RES-15343
R23 R48 R73 = SparkFun-Resistors; PROD_ID: RES-07863; VALUE: 100
S1-S3 = SparkFun-Switches; PROD_ID: SWCH-14139
T1-T3 = ADIN1110; PROD_ID: COMP-16426
TP1-TP3 = SparkFun-Connectors
U1 U7 U11 = ADIN1110; PROD_ID: IC-16335
U2 U5 U9 = SparkFun-IC-Memory; PROD_ID: IC-14645
U3 U6 U10 = SparkFun-IC-Power; PROD_ID: VREG-12457
U4 U8 U12 = ADIN1110; PROD_ID: DIO-16429
U$1-U$4 U$6-U$16 U$19-U$30 U$32-U$36 U$38 U$39 U$41-U$58 U$60-U$62 U$64 U$67-U$72 U$74-U$91 U$93-U$96 = output
U$31 U$59 U$92 = ADIN1110
Y1-Y3 = SparkFun-Clocks; PROD_ID: XTAL-16235

## Nets
1.1V: C11.1 C15.1 U1.23 U1.24
1.1V1: C30.1 C34.1 U7.23 U7.24
1.1V2: C52.1 C56.1 U11.23 U11.24
3.3V: C4.1 C9.1 C10.1 C12.1 C13.1 C14.1 C16.1 C17.1 LED-PWR.2 R8.1 R10.2 R11.1 R12.2 R13.2 R14.2 R15.2 R16.2 R17.2 R18.2 R20.1 R24.2 R25.2 TP1.1 U1.16 U1.17 U1.22 U1.35 U2.8 U3.5
3.3V1: C25.1 C28.1 C29.1 C31.1 C32.1 C33.1 C35.1 C36.1 LED-PWR1.2 R28.1 R32.2 R33.1 R34.2 R35.2 R36.2 R37.2 R38.2 R39.2 R40.1 R41.2 R49.2 R50.2 TP2.1 U5.8 U6.5 U7.16 U7.17 U7.22 U7.35
3.3V2: C47.1 C50.1 C51.1 C53.1 C54.1 C55.1 C57.1 C58.1 LED-PWR2.2 R53.1 R57.2 R58.1 R59.2 R60.2 R61.2 R62.2 R63.2 R64.2 R65.1 R66.2 R74.2 R75.2 TP3.1 U9.8 U10.5 U11.16 U11.17 U11.22 U11.35
3.3V_IN: J2.73 R22.1
3.3V_IN1: J3.73 R26.1
3.3V_IN2: J5.73 R51.1
!CS!: J2.49 R25.1 U1.29
!CS!1: J3.49 R50.1 U7.29
!CS!2: J5.49 R75.1 U11.29
!INT!: J2.47 R24.1 U1.25
!INT!1: J3.47 R49.1 U7.25
!INT!2: J5.47 R74.1 U11.25
!RESET!: J2.57 S1.3 U1.5
!RESET!1: J3.57 S2.3 U7.5
!RESET!2: J5.57 S3.3 U11.5
!SWPD_EN!: SWPD.1 U1.33
!SWPD_EN!1: SWPD1.1 U7.33
!SWPD_EN!2: SWPD2.1 U11.33
!TX2P4_EN!: TX2P4.1 U1.31
!TX2P4_EN!1: TX2P1.1 U7.31
!TX2P4_EN!2: TX2P2.1 U11.31
A0: J2.36 U2.1
A1: J2.34 U2.2
A2: J2.32 U2.3
A3: J3.36 U5.1
A4: J3.32 U5.3
A5: J3.34 U5.2
A6: J5.36 U9.1
A7: J5.32 U9.3
A8: J5.34 U9.2
DA+: J1.1 T1.7
DA+1: J4.1 T2.7
DA+2: J6.1 T3.7
DA-: J1.2 T1.6
DA-1: J4.2 T2.6
DA-2: J6.2 T3.6
EWP: EWP.2 J2.40 R8.2 U2.7
EWP1: EWP1.2 J3.40 R28.2 U5.7
EWP2: EWP2.2 J5.40 R53.2 U9.7
GND: C3.2 C4.2 C5.2 C6.2 C7.2 C8.2 C9.2 C10.2 C11.2 C12.2 C13.2 C14.2 C15.2 C16.2 C17.2 C18.2 C19.2 C20.2 C21.2 EWP.1 J2.1 J2.33 J2.39 J2.45 J2.75 J2.GND1 J2.GND2 J2.GND3 J2.GND4 J2.GND5 J2.GND6 PWR.C Q1.2 R19.2 R21.1 S1.1 SHLD.1 U1.EP U2.4 U3.2 U4.3
GND1: C23.2 C24.2 C25.2 C26.2 C27.2 C28.2 C29.2 C30.2 C31.2 C32.2 C33.2 C34.2 C35.2 C36.2 C37.2 C38.2 C41.2 C42.2 C43.2 EWP1.1 J3.1 J3.33 J3.39 J3.45 J3.75 J3.GND1 J3.GND2 J3.GND3 J3.GND4 J3.GND5 J3.GND6 PWR1.C Q4.2 R42.1 R43.2 S2.1 SHLD1.1 U5.4 U6.2 U7.EP U8.3
GND2: C45.2 C46.2 C47.2 C48.2 C49.2 C50.2 C51.2 C52.2 C53.2 C54.2 C55.2 C56.2 C57.2 C58.2 C59.2 C60.2 C63.2 C64.2 C65.2 EWP2.1 J5.1 J5.33 J5.39 J5.45 J5.75 J5.GND1 J5.GND2 J5.GND3 J5.GND4 J5.GND5 J5.GND6 PWR2.C Q6.2 R67.1 R68.2 S3.1 SHLD2.1 U9.4 U10.2 U11.EP U12.3
I2C_SCL: J2.21 U2.6
I2C_SCL1: J3.21 U5.6
I2C_SCL2: J5.21 U9.6
I2C_SDA: J2.19 U2.5
I2C_SDA1: J3.19 U5.5
I2C_SDA2: J5.19 U9.5
LED_0: LED-0.2 U1.3
LED_1: LED-1.2 U1.6
LED_2: LED-2.2 U7.6
LED_3: LED-3.2 U7.3
LED_4: LED-4.2 U11.6
LED_5: LED-5.2 U11.3
LINK_ST: LED-LINK.2 U1.4
LINK_ST1: LED-LINK1.2 U7.4
LINK_ST2: LED-LINK2.2 U11.4
MS_SEL: MS_SEL.1 U1.30
MS_SEL1: MS_SEL1.1 U7.30
MS_SEL2: MS_SEL2.1 U11.30
N$1: MEAS.1 MEAS.3 Q2.3
N$2: C3.1 C8.1 MEAS.2 MEAS.4 U3.1
N$3: C21.1 T1.5
N$4: C22.1 T1.4
N$5: LED-LINK.1 LINK_ST.A R19.1
N$6: LED-1.1 LED_1.C R18.1
N$7: C22.2 R23.1 T1.3
N$8: C20.1 R23.2
N$9: LED-0.1 LED_0.C R17.1
N$10: C23.1 C24.1 MEAS1.2 MEAS1.4 U6.1
N$11: Q1.3 Q2.1 R7.1
N$12: C5.1 U1.8 Y1.1
N$13: MEAS1.1 MEAS1.3 Q3.3
N$14: C6.1 U1.9 Y1.3
N$15: Q3.1 Q4.3 R27.1
N$16: LED-PWR1.1 R29.2
N$17: PWR1.A R29.1
N$18: R10.1 U1.26
N$19: LED-PWR.1 R9.2
N$20: PWR.A R9.1
N$21: C18.1 U1.19
N$22: C19.1 U1.20
N$23: LED_0.A R11.2
N$24: C1.1 R2.1 R4.1
N$25: MS_SEL.2 R14.1
N$26: R13.1 SWPD.2
N$27: R12.1 TX2P4.2
N$28: R16.1 SPI_CFG0.2
N$29: R15.1 SPI_CFG1.2
N$30: LED_1.A R20.2
N$31: C2.1 R1.1 R3.2
N$32: C1.2 T1.1 U4.2
N$33: LINK_ST.C R21.2
N$34: C2.2 T1.2 U4.1
N$35: R4.2 R6.2 U1.13
N$36: R3.1 R5.1 U1.14
N$37: R1.2 R6.1 U1.15
N$38: R2.2 R5.2 U1.12
N$39: C26.1 U7.8 Y2.1
N$40: C27.1 U7.9 Y2.3
N$41: C7.1 SHLD.3
N$42: R32.1 U7.26
N$43: J1.S1 J1.S2 J1.S3 J1.S4 SHLD.2
N$44: C37.1 U7.19
N$45: C38.1 U7.20
N$46: MS_SEL1.2 R36.1
N$47: R35.1 SWPD1.2
N$48: R34.1 TX2P1.2
N$49: R38.1 SPI_CFG3.2
N$50: R37.1 SPI_CFG2.2
N$51: LED_2.A R33.2
N$52: LED_3.A R40.2
N$53: LINK_ST1.C R42.2
N$54: C40.1 R30.1 R46.1
N$55: C39.1 R31.1 R47.2
N$56: R45.2 R46.2 U7.13
N$57: R44.1 R47.1 U7.14
N$58: R31.2 R45.1 U7.15
N$59: R30.2 R44.2 U7.12
N$60: C40.2 T2.1 U8.2
N$61: C39.2 T2.2 U8.1
N$62: C41.1 SHLD1.3
N$63: J4.S1 J4.S2 J4.S3 J4.S4 SHLD1.2
N$64: C43.1 T2.5
N$65: C44.1 T2.4
N$66: C44.2 R48.1 T2.3
N$67: C42.1 R48.2
N$68: LED-LINK1.1 LINK_ST1.A R43.1
N$69: LED-2.1 LED_3.C R41.1
N$70: LED-3.1 LED_2.C R39.1
N$71: C45.1 C46.1 MEAS2.2 MEAS2.4 U10.1
N$72: MEAS2.1 MEAS2.3 Q5.3
N$73: Q5.1 Q6.3 R52.1
N$74: LED-PWR2.1 R54.2
N$75: PWR2.A R54.1
N$76: C48.1 U11.8 Y3.1
N$77: C49.1 U11.9 Y3.3
N$78: R57.1 U11.26
N$79: C59.1 U11.19
N$80: C60.1 U11.20
N$81: MS_SEL2.2 R61.1
N$82: R60.1 SWPD2.2
N$83: R59.1 TX2P2.2
N$84: R63.1 SPI_CFG5.2
N$85: R62.1 SPI_CFG4.2
N$86: LED_4.A R58.2
N$87: LED_5.A R65.2
N$88: LINK_ST2.C R67.2
N$89: C62.1 R55.1 R71.1
N$90: C61.1 R56.1 R72.2
N$91: R70.2 R71.2 U11.13
N$92: R69.1 R72.1 U11.14
N$93: R56.2 R70.1 U11.15
N$94: R55.2 R69.2 U11.12
N$95: C62.2 T3.1 U12.2
N$96: C61.2 T3.2 U12.1
N$97: C63.1 SHLD2.3
N$98: J6.S1 J6.S2 J6.S3 J6.S4 SHLD2.2
N$99: C65.1 T3.5
N$100: C66.1 T3.4
N$101: C66.2 R73.1 T3.3
N$102: C64.1 R73.2
N$103: LED-LINK2.1 LINK_ST2.A R68.1
N$104: LED-4.1 LED_5.C R66.1
N$105: LED-5.1 LED_4.C R64.1
PWR_EN: J2.71 Q1.1 R22.2 U3.3
PWR_EN1: J3.71 Q4.1 R26.2 U6.3
PWR_EN2: J5.71 Q6.1 R51.2 U10.3
SPI_CFG1: SPI_CFG1.1 U1.37
SPI_CFG2: SPI_CFG2.1 U7.37
SPI_CFG3: SPI_CFG4.1 U11.37
SPI_CIPO/SPI_CFG0: J2.7 SPI_CFG0.1 U1.2
SPI_CIPO/SPI_CFG1: J3.7 SPI_CFG3.1 U7.2
SPI_CIPO/SPI_CFG2: J5.7 SPI_CFG5.1 U11.2
SPI_COPI: J2.5 U1.1
SPI_COPI1: J3.5 U7.1
SPI_COPI2: J5.5 U11.1
SPI_SCK: J2.3 U1.38
SPI_SCK1: J3.3 U7.38
SPI_SCK2: J5.3 U11.38
VCC_IN: J2.72 J2.74 Q2.2 R7.2
VCC_IN1: J3.72 J3.74 Q3.2 R27.2
VCC_IN2: J5.72 J5.74 Q5.2 R52.2